# Altium PCB Daughter_Board.PcbDoc
Units mm, origin at the board's own origin, x right, y up, seen from the top; angles counter-clockwise.
Board outline 55 x 102.19 mm, 2 copper layers (Top Layer, Bottom Layer); 18 components, 19 nets, 79 pads, 3 vias.
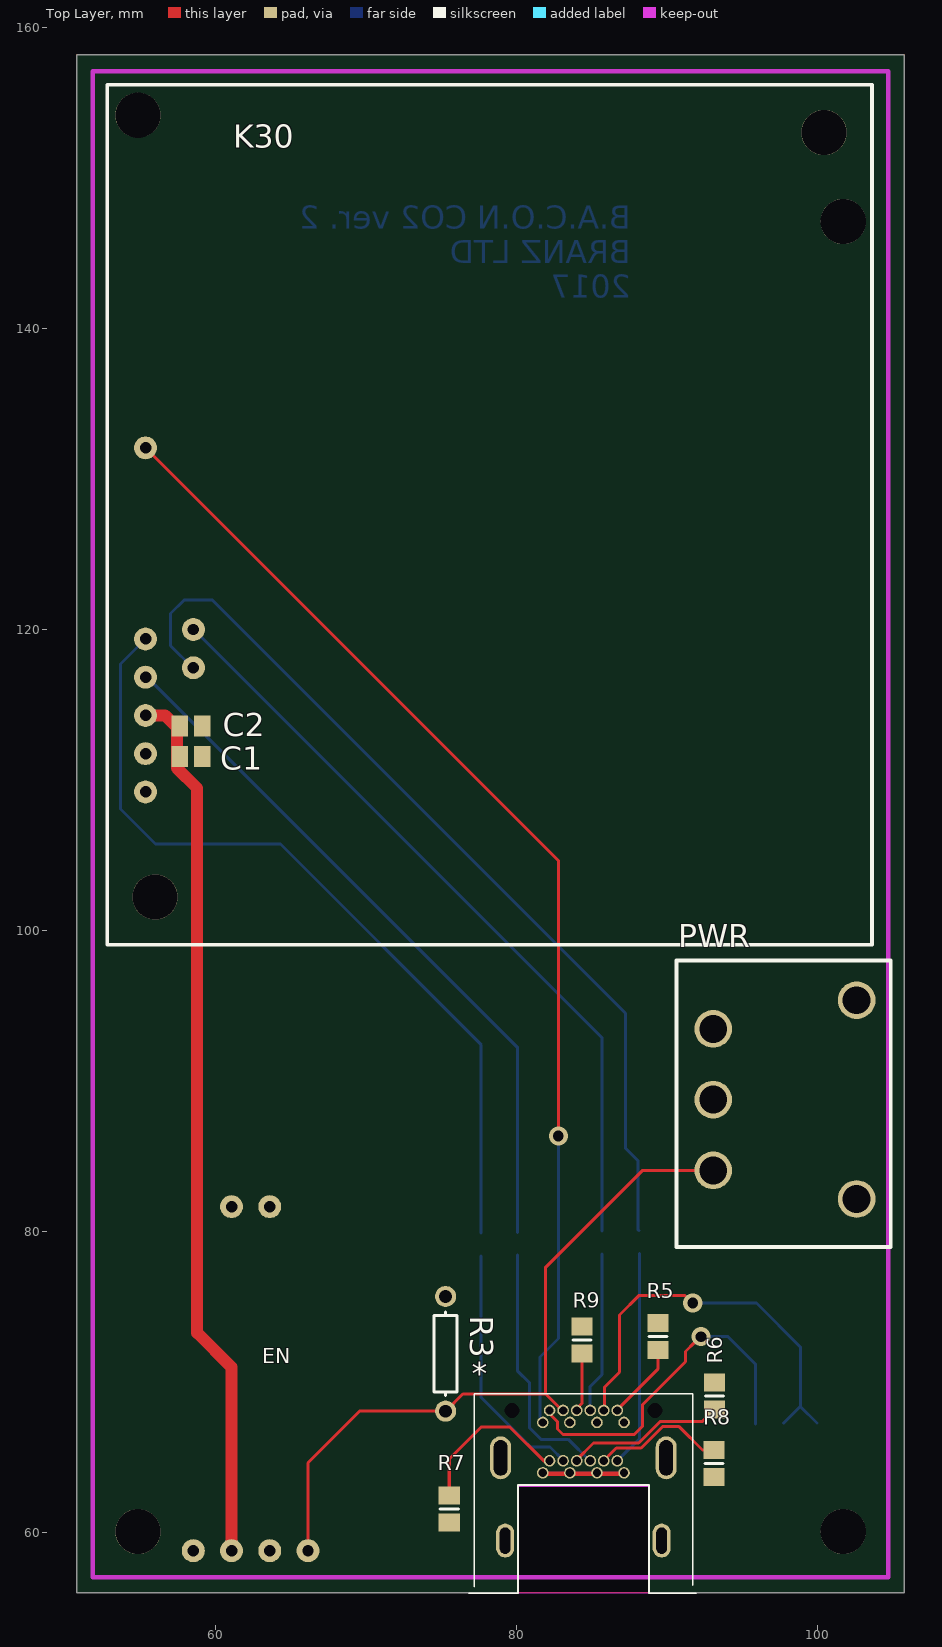
[diagram p0: Top Layer view]
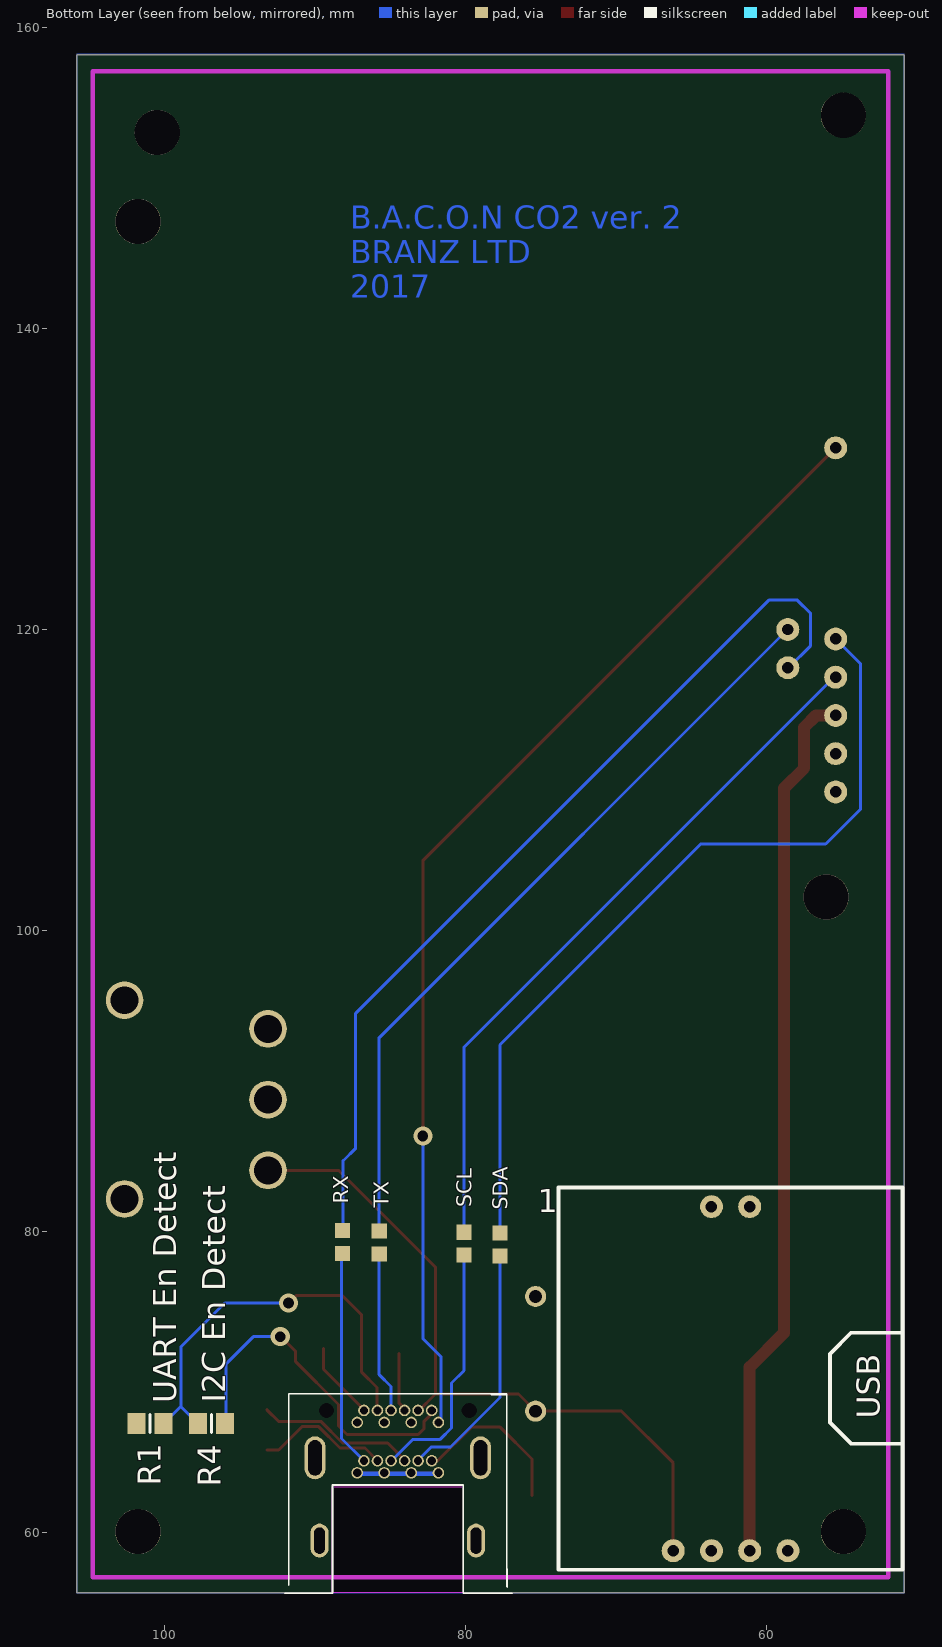
[diagram p1: Bottom Layer view, seen from below]

## Layer stack, top to bottom
Top Solder: solder mask 0.0102, Solder Resist, Dk 3.5
Top Layer: signal copper 0.0356
Dielectric 1: dielectric 0.32, FR-4, Dk 4.8
Bottom Layer: signal copper 0.0356
Bottom Solder: solder mask 0.0102, Solder Resist, Dk 3.5

## Board outline
50.8,56.007 80.112,56.007 80.112,63.157 88.798,63.157 88.798,56.007 105.8,56.007 105.8,158.2 50.8,158.2
cut-out: 88.811,56.005 88.811,63.055 80.112,63.055 80.112,56.005

## Design rules (kind name [scope] priority, off if disabled: settings)
Clearance [All] p1: gap=0.102
HoleSize [All] p1: absolutevalues=TRUE maxlimit=6 minlimit=0.3 maxpercent=80.000 minpercent=20.000
MinimumAnnularRing [All] p1: minimumring=0.152
PolygonConnect [All] p1: connectstyle=Relief reliefconductorwidth=0.254 reliefentries=4 polygonreliefangle="90 Angle" airgapwidth=0.254
RoutingVias [All] p1: holewidth=0.4 width=0.8 viastyle="Through Hole" minholewidth=0.711 minwidth=1.27 maxholewidth=0.711 maxwidth=1.27
SolderMaskExpansion [All] p1: expansion=0.102
Width [All] p1: maxlimit=0.8 minlimit=0.2 preferedwidth=0.4
29 further rules are at their usual default settings.

## Components (designator, comment, footprint, x,y, rotation, side; value= is the part's Value field where it differs from the comment)
1 "Sparkfun_LipoBooster" Sparkfun_lipoBooster 63.627,58.801 r90 bottom
* "Mini_displayport_Sink" CONN_Displayport 84.468,68.123 r0 top
C1 "Cap Semi" C0805 58.382,111.569 r180 top
C2 "Cap Semi" C0805 58.382,113.589 r180 top
K30 "K30_STA" K30_STA 55.372,119.38 r0 top
PWR "Switch" Switch_footprint 93.091,88.773 r90 top
R1 "Res3" 6-0805_N 100.927,67.259 r0 bottom
R3 "Res1" AXIAL-0.3 75.311,71.882 r270 top
R4 "Res3" 6-0805_N 96.837,67.259 r0 bottom
R5 "Res3" 6-0805_N 89.408,73.025 r90 top
R6 "Res3" 6-0805_N 93.167,69.075 r90 top
R7 "Res3" 6-0805_N 75.552,61.582 r270 top
R8 "Res3" 6-0805_N 93.154,64.592 r270 top
R9 "Res3" 6-0805_N 84.379,72.796 r90 top
RX "Solder_Jumper" Solder_Jumper_Footprint 88.151,78.549 r90 bottom
SCL "Solder_Jumper" Solder_Jumper_Footprint 80.073,78.435 r90 bottom
SDA "Solder_Jumper" Solder_Jumper_Footprint 77.673,78.397 r90 bottom
TX "Solder_Jumper" Solder_Jumper_Footprint 85.7,78.524 r90 bottom

## Footprints (in the part's own frame and the unit in brackets; to place one, negate y for a bottom-side part, rotate by r counter-clockwise, add the part's x,y. Pads: shape width x height; smd on the part's side, far side on the other; paste and mask are expansions set on the pad)
6-0805_N [mm] "Chip Resistor, Body 2.0x1.2mm, IPC Medium Density"
  rect 1.2x1.4 smd: 1(-0.9,0) 2(0.9,0)
  silkscreen extent 0,-0.6 0,0.6, body extent -1.07,-0.7 1.07,0.7, height 0.7
AXIAL-0.3 [mm] "Axial Device, Thru-Hole; 2 Leads; 0.3 in Pin Spacing"
  round 1.4 hole 0.85: 1(-3.81,0) 2(3.81,0)
  silkscreen extent -2.77,-0.76 2.77,0.76
C0805 [mm] "Chip Capacitor, Body 2.0x1.3mm, IPC High Density"
  rect 1.1x1.4 smd: 1(-0.75,0) 2(0.75,0)
  body extent -1.1,-0.72 1.1,0.72, height 1.4
CONN_Displayport [mm]
  oval 1.4x2.85 hole 0.9 slot 2.35 at 90 deg: 0(-5.5,-3.15) 0(5.5,-3.15)
  oval 1.2x2.25 hole 0.7 slot 1.74 at 90 deg: 0(-5.2,-8.65) 0(5.2,-8.65)
  round 0.77 hole 0.55: 1(-2.7,-4.15) 2(-2.7,-0.8) 3(-2.25,-3.35) 4(-2.25,0) 5(-1.35,-3.35) 6(-1.35,0) 7(-0.9,-4.15) 8(-0.9,-0.8) 9(-0.45,-3.35) 10(-0.45,0) 11(0.45,-3.35) 12(0.45,0) 13(0.9,-4.15) 14(0.9,-0.8) 15(1.35,-3.35) 16(1.35,0) 17(2.25,-3.35) 18(2.25,0) 19(2.7,-4.15) 20(2.7,-0.8)
  round 0 hole 1 unplated: 21(-4.75,0) 21(4.75,0)
  silkscreen extent -7.6,-12.15 7.5,1.1
K30_STA [mil]
  round 60 hole 30: 1(0,500) 2(0,0) 3(0,-100) 4(125.2,24.8) 5(125.2,-75.2) 6(0,-200) 7(0,-300) 8(0,-400)
  round 118.11 hole 118.11 unplated: 9(25,-674.8) 9(1774.8,1324.8)
  silkscreen extent -100,-800 1900,1450, body extent -100,-800 1900,1450, height 571
Solder_Jumper_Footprint [mm]
  rect 1x1 smd: 1(0,0) 2(1.524,0)
Sparkfun_lipoBooster [mil]
  round 60 hole 30: 1(0,100) 2(0,0) 3(0,-100) 4(0,-200) 5(900,-100) 6(900,0)
  silkscreen extent -50,-500 950,400
Switch_footprint [mm]
  round 2.5 hole 1.85: 0(-6.605,-9.53) 0(6.605,-9.53) 1(4.7,0) 2(0,0) 3(-4.7,0)
  Mechanical 1 keep-out lines w0.254: -9.4,2.1 -9.4,1.35 -9.4,-11.4 8.9,-11.4 8.9,2.1 -9.4,2.1
  silkscreen extent -9.8,-11.8 9.25,2.45

## Part data
C1 C2: "Capacitor (Semiconductor SIM Model)"
R1 R3 R4 R5 R6 R7 R8 R9: "Resistor"

## Free pads (board coordinates)
  round 3 hole 3 unplated: 20(54.864,60.071) 20(54.864,154.178) 20(101.727,60.071) 20(101.727,147.12)

## Via types
v1: diameter 1.27, hole 0.711, Top Layer to Bottom Layer, 3 vias

## Nets (pads, with @x,y where several pads share a name; then routed paths per layer and width w, separated by ;. In a path a pad name is that pad's centre, name@x,y a point inside that pad or via, vN(x,y) a via of type N, cw(c..) or ccw(c..) an arc to the next point about the centre after c; other vN are vias at no path point)
GND: 1.2 *.0 *.1 *.7 *.8 *.13 *.14 *.19 C1.1 C2.1 K30.7 PWR.2 R1.2 R3.1 R5.2 R6.2 R7.2 R8.2 R9.2 | length 10.8
  Top Layer w0.3: *.1@81.755,63.922 *.19@87.15,63.922
  Bottom Layer w0.3: *.1@81.747,63.922 83.555,63.922 85.355,63.922 *.19@87.155,63.922
Net*_2: *.2 K30.1 | length 76.8
  Top Layer w0.2: K30.1 82.804,104.648 v1(82.804,86.36)
  Bottom Layer w0.2: *.2@81.755,67.272 81.58,67.447 81.58,71.674 82.804,72.898 v1(82.804,86.36)
Net*_3: *.3 R7.1 | length 10.9
  Top Layer w0.2: R7.1@75.552,62.471 75.552,64.897 77.66,67.005 79.591,67.005 81.823,64.773 *.3
Net*_4: *.4 R4.1 | length 22.8
  Top Layer w0.2: *.4 82.218,67.896 82.74,67.373 82.74,66.891 83.109,66.523 87.541,66.523 ; 87.579,66.523 87.846,66.523 88.405,67.081 88.405,68.516 91.249,71.361 91.249,72.034 v1@91.859,72.644 ; v1@92.266,73.012 v1(92.278,73.025)
  Bottom Layer w0.2: v1(92.278,73.025) 94.069,73.025 95.898,71.196 R4.1@95.898,67.208
Net*_5: *.5 SDA.1 | length 16.6
  Bottom Layer w0.2: SDA.1 77.673,68.986 80.962,65.697 82.245,65.697 *.5@83.16,64.783
Net*_6: 1.1 *.6 PWR.3 R3.2 | length 47.5
  Top Layer w0.2: 1.1@66.167,58.674 1.1 66.167,64.643 69.596,68.072 R3.2 76.454,69.215 81.962,69.215 ; *.6@83.105,68.072 81.962,69.215 ; PWR.3@93.154,84.049 88.367,84.049 81.962,77.644 81.962,69.215
Net*_9: *.9 R6.1 | length 10.6
  Top Layer w0.2: *.9@83.998,64.808 85.141,65.951 88.138,65.951 89.586,67.399 92.391,67.399 R6.1
Net*_10: *.10 R9.1 | length 3.8
  Top Layer w0.2: *.10@84.01,68.224 84.379,68.593 R9.1
Net*_11: *.11 SCL.1 | length 16.7
  Bottom Layer w0.2: SCL.1 80.073,70.764 80.899,69.939 80.899,66.954 81.648,66.205 83.452,66.205 *.11@84.9,64.757
Net*_12: *.12 TX.1 | length 10.7
  Bottom Layer w0.2: *.12@84.912,68.135 84.912,69.71 85.7,70.498 TX.1
Net*_15: *.15 R8.1 | length 8.9
  Top Layer w0.2: *.15@85.827,64.795 86.652,65.621 88.303,65.621 89.725,67.043 90.83,67.043 92.382,65.492 R8.1
Net*_16: *.16 R1.1 R4.2 | length 27.8
  Top Layer w0.2: *.16@85.852,68.072 85.852,69.647 86.868,70.663 86.868,74.46 88.176,75.768 91.186,75.768 91.681,75.273 v1@91.694,75.273
  Bottom Layer w0.2: v1(91.732,75.26) 95.961,75.26 98.882,72.339 98.882,68.389 ; R4.2@97.765,67.272 98.882,68.389 ; R1.1@99.987,67.285 98.882,68.389
Net*_17: *.17 RX.1 | length 14.4
  Bottom Layer w0.2: *.17 88.201,66.257 RX.1@88.201,78.549
Net*_18: *.18 R5.1 | length 5.1
  Top Layer w0.2: *.18@86.741,68.199 89.408,70.866 R5.1@89.408,72.225
NetK30_2: K30.2 SDA.2 | length 54.9
  Bottom Layer w0.2: K30.2 53.708,117.716 53.708,108.077 56.032,105.753 64.338,105.753 77.673,92.418 SDA.2
NetK30_3: K30.3 SCL.2 | length 47.2
  Bottom Layer w0.2: K30.3@55.347,116.84 K30.3 55.486,116.84 80.073,92.253 SCL.2
NetK30_4: K30.4 TX.2 | length 51.3
  Bottom Layer w0.2: K30.4@58.509,120.078 85.7,92.888 TX.2
NetK30_5: K30.5 RX.2 | length 61
  Bottom Layer w0.2: K30.5@58.522,117.45 57.036,118.935 57.036,121.069 57.925,121.958 59.817,121.958 87.268,94.507 87.268,85.541 88.075,84.734 ; 88.1,84.734 88.1,80.124 RX.2
VCC: 1.3 C1.2 C2.2 K30.6 | length 58.6
  Top Layer w0.8: K30.6 56.68,114.3 57.468,113.513 57.468,110.795 58.801,109.461 58.801,73.279 61.087,70.993 1.3
pads on no net: 1.4 1.5 1.6 *.20 *.21 K30.8 K30.9 PWR.0 PWR.1

## Polygon pours and split planes (outlines as drawn)
GND on Bottom Layer "Bottom Layer-GND" (solid, remove dead copper, shelved, pour order 0): 50.8,56.007 50.8,158.242 105.791,158.242 105.791,56.007
GND on Top Layer "Top Layer-GND" (solid, remove dead copper, shelved, pour order 2): 50.8,56.007 50.8,158.242 105.791,158.242 105.791,56.007

## Keep-outs
Keep-Out Layer:
  lines w0.3: 51.88,57.036 104.737,57.036 104.737,157.112 51.88,157.112 51.88,57.036

## Other copper
Bottom Layer:
  text "B.A.C.O.N CO2 ver. 2 / BRANZ LTD / 2017" at 87.617,142.049 h1.52

## Silkscreen, mask and mechanical layers (free items; w line width, h text height)
Top Overlay:
  text "EN" at 63.119,71.247 h1
Bottom Overlay:
  lines w0.1: 77.203,56.363 77.203,57.607 ; 77.216,69.164 78.257,69.164
  text "I2C En Detect" at 95.923,68.631 h1.52 r270
  text "UART En Detect" at 99.2,68.593 h1.52 r270

## Text inside footprints (layer, text, board x,y; h text height)
1: Bottom Overlay "USB" at 52.451,67.564 h1.52 r270